# Altium PCB ver_6.PcbDoc
Units mil, origin at the board's own origin, x right, y up, seen from the top; angles counter-clockwise.
Board outline 2874.65 x 4650.67 mil, 2 copper layers (Top Layer, Bottom Layer); 64 components, 49 nets, 262 pads, 38 vias.
Unrouted connection lines stored in the file: 5.
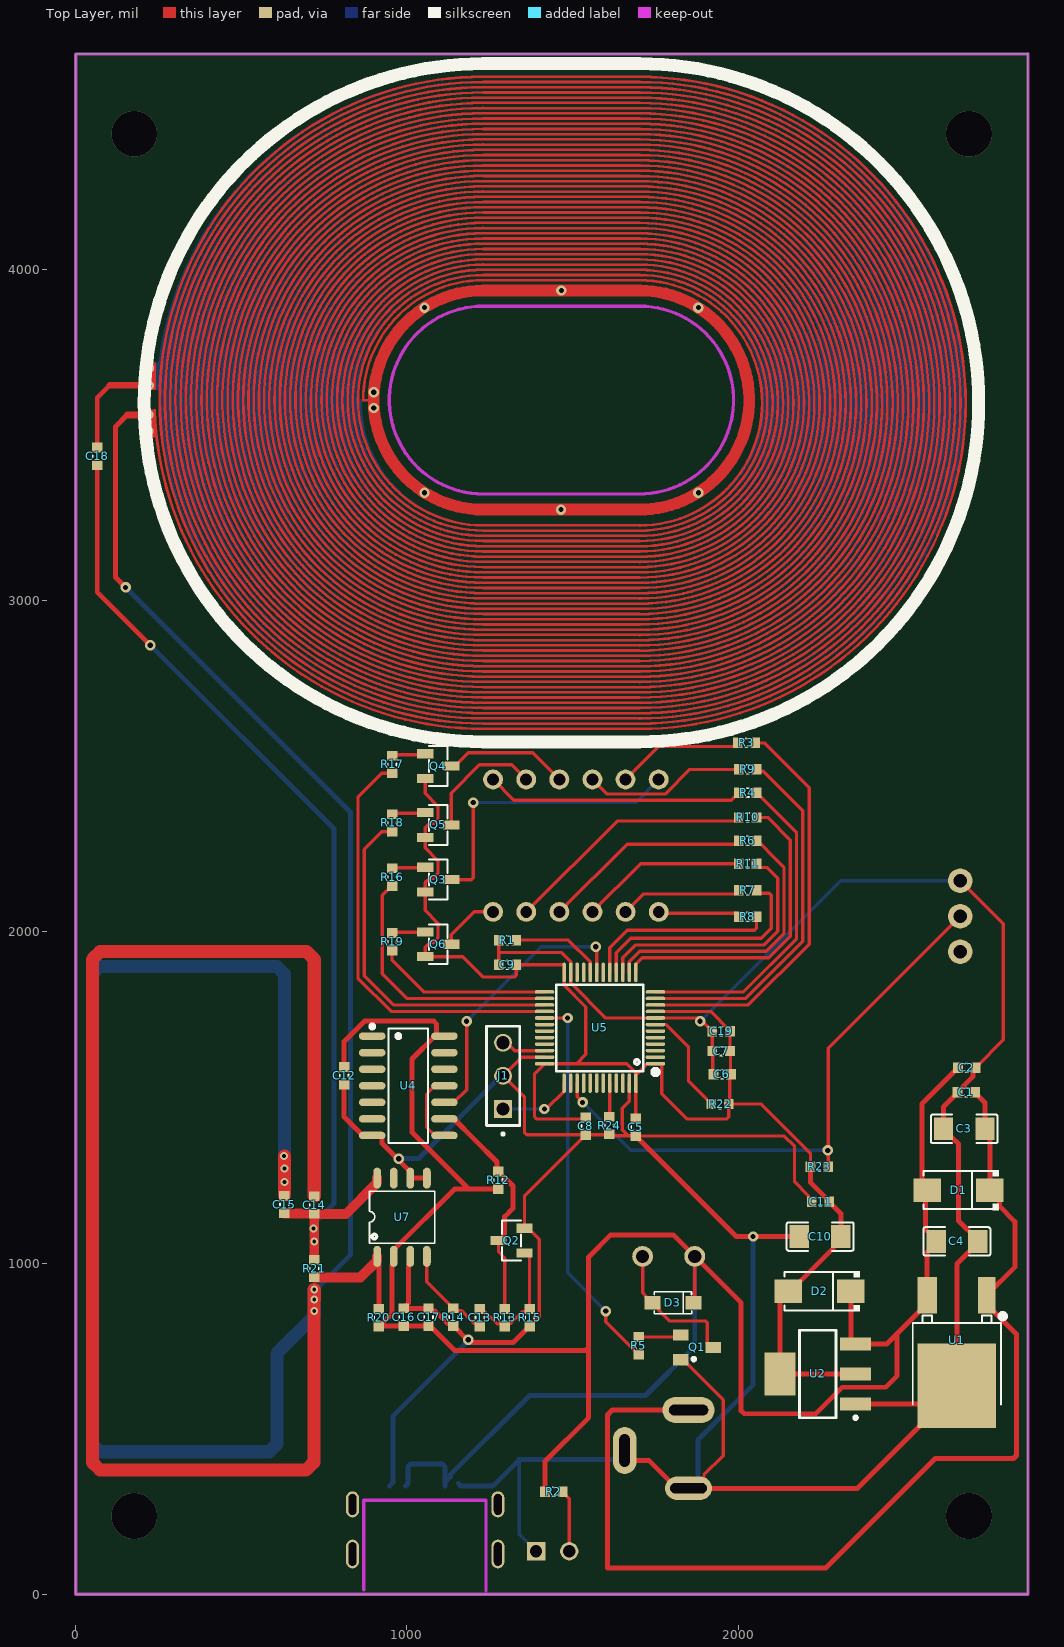
[diagram p0: Top Layer view]
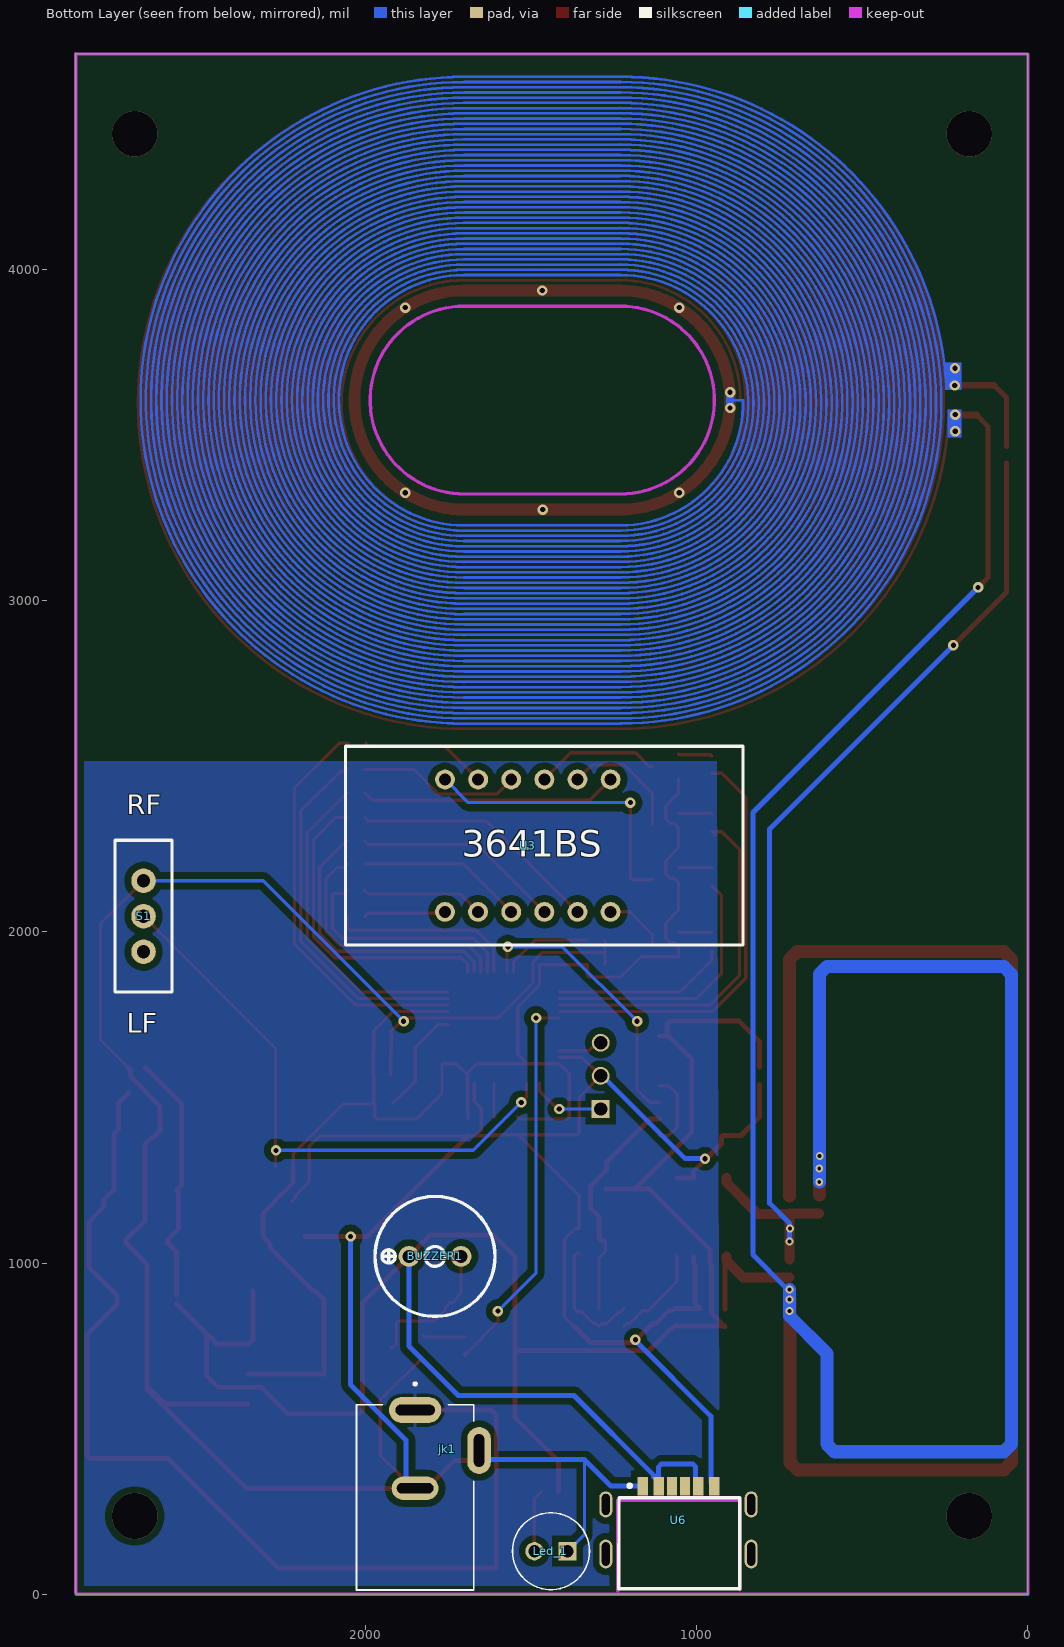
[diagram p1: Bottom Layer view, seen from below]
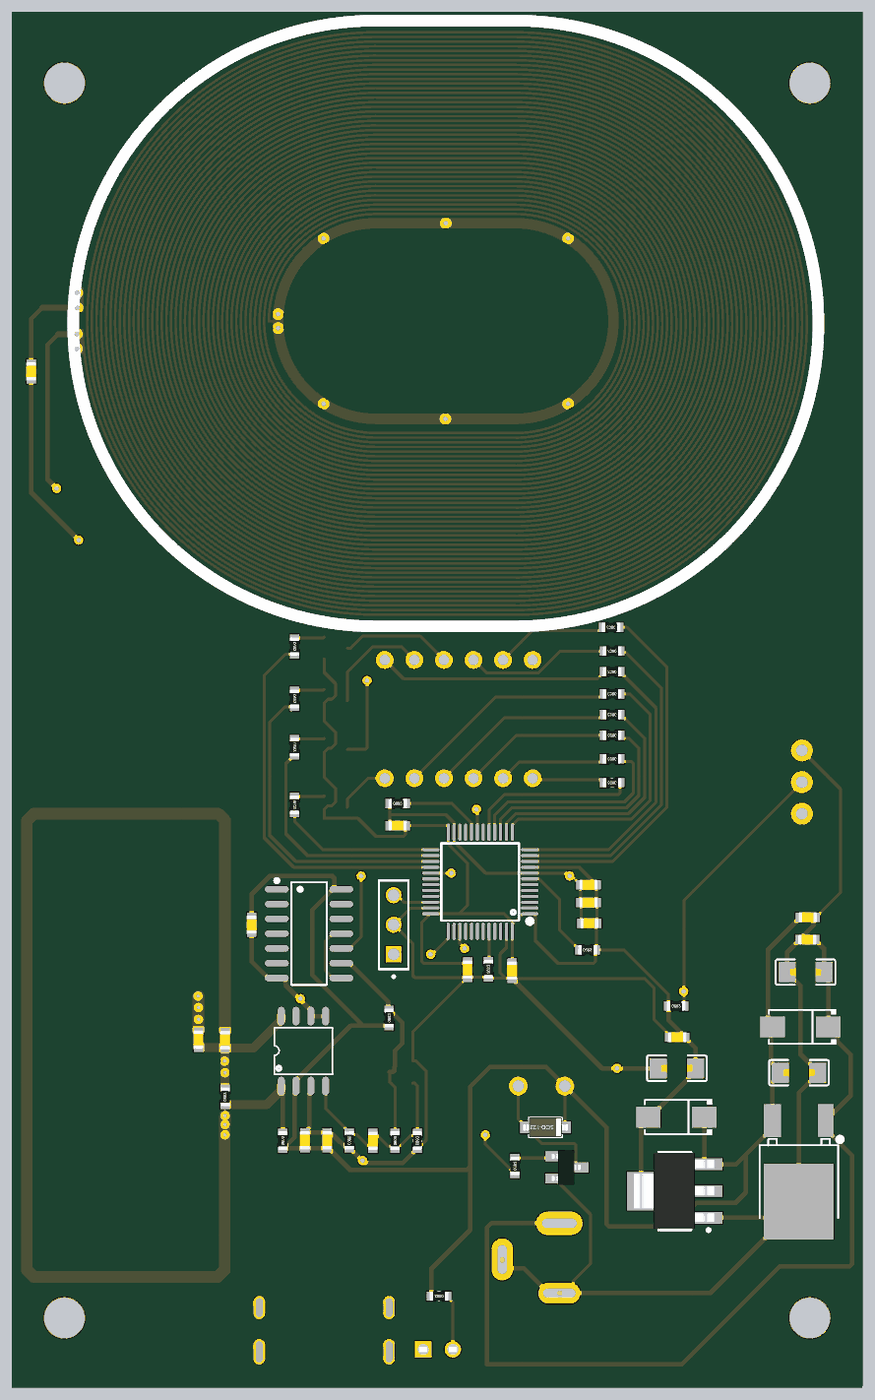
[diagram p2: 3D render of the assembled board from above, using the file's embedded part models]

## Layer stack, top to bottom
Top Solder: solder mask 0.4, Solder Resist, Dk 3.5
Top Layer: signal copper 1.4
Dielectric 1: dielectric 12.6, FR-4, Dk 4.8
Bottom Layer: signal copper 1.4
Bottom Solder: solder mask 0.4, Solder Resist, Dk 3.5

## Board outline
0,0 2874.02,0 2874.65,5 2874.65,4650.67 2874.02,4649.96 0,4650

## Design rules (kind name [scope] priority, off if disabled: settings)
Clearance [All] p1: gap=20 ignorepadtopadclearanceinfootprint=FALSE
PolygonConnect [All] p1: connectstyle=Relief reliefconductorwidth=10 reliefentries=4 polygonreliefangle="90 Angle" airgapwidth=10
RoutingVias [All] p1: holewidth=15.75 width=31.5 viastyle="Through Hole" minholewidth=11.81 minwidth=23.62 maxholewidth=15.75 maxwidth=31.5
SolderMaskExpansion [All] p1: expansion=4 istentingtop=FALSE
Width [InNet('3V3') or ('5V') or InNet('9V') or InNet('GND')] p1: maxlimit=15 minlimit=10 preferedwidth=15
Width Width_1 [All] p2: maxlimit=30 minlimit=10 preferedwidth=15
30 further rules are at their usual default settings.

## Classes and differential pairs
component class ver_3: C3 C5 C6 C7 C8 C9 D2 J1 Led_1 Q Q1 Q2 Q3 Q4 Q5 Q6 R1 R2 R5 R12 R13 R14 R15 R16 R17 R18 R19 R20 R21 R22 U1 U2 U4 U7

## Components (designator, comment, footprint, x,y, rotation, side; value= is the part's Value field where it differs from the comment)
BUZZER1 "buzzer_9x5.5" buzzer_9x5.5 1790,1020 r90 bottom
C1 "0.1uF" CN-SMD-0603 2688.43,1515 r0 top
C2 "0.1uF" CN-SMD-0603 2690,1590 r180 top
C3 "22uF" cap_1206 2682.3,1405 r0 top
C4 "22uF" cap_1206 2660,1065 r180 top
C5 "104" CN-SMD-0603 1690,1410 r270 top
C6 "104" CN-SMD-0603 1951.57,1570 r180 top
C7 "104" CN-SMD-0603 1948.43,1640 r0 top
C8 "104" CN-SMD-0603 1540,1413.43 r270 top
C9 "104" CN-SMD-0603 1303.43,1900 r0 top
C10 "22uF" cap_1206 2247.3,1080 r0 top
C11 "0.1uF" CN-SMD-0603 2248.43,1185 r0 top
C12 "104" CN-SMD-0603 810,1565 r90 top
C13 "150pF" CN-SMD-0603 1220,835 r270 top
C14 "100pF" CN-SMD-0603 720,1175 r90 top
C15 "1nF" CN-SMD-0603 630,1176.58 r90 top
C16 "104" CN-SMD-0603 990,836.57 r270 top
C17 "104" CN-SMD-0603 1065,836.57 r270 top
C18 "1nF" CN-SMD-0603 65,3435 r90 top
C19 "104" CN-SMD-0603 1948.43,1700 r180 top
D1 "diode_1N4007(M7)" diode_1N4007-M7 2665,1220 r180 top
D2 "diode_1N4007(M7)" diode_1N4007-M7 2245.51,915 r180 top
D3 "1N4148" SOD-123 1805.35,878.43 r0 top value=1N4007
J1 "JP3x1" JP3x1 1290,1390 r90 top
jk1 "jack dc" "jack dc" 1850,556.22 r270 bottom
Led_1 "led_5mm" led_5mm 1440,130 r0 bottom
Q1 "AO3400" SOT23B 1876.18,745.24 r270 top value=C1815
Q2 "J3Y" j3y -15636.99,17664.6 r0 top
Q3 "2TY" 2TY 18046.99,-14439.6 r180 top
Q4 "2TY" 2TY 18046.99,-14097 r180 top
Q5 "2TY" 2TY 18046.99,-14274.6 r180 top
Q6 "2TY" 2TY 18046.99,-14634.6 r180 top
R1 "10K" RES-SMD-0603 1303.43,1975 r0 top value="R1/4W - 1K"
R2 "1K" RES-SMD-0603 1443.43,310 r180 top value="R1/4W - 1K"
R3 "330" RES-SMD-0603 2025,2570 r180 top value="R1/4W - 1K"
R4 "330" RES-SMD-0603 2028.42,2420 r180 top value="R1/4W - 1K"
R5 "1K" RES-SMD-0603 1700,750 r90 top value="R1/4W - 1K"
R6 "330" RES-SMD-0603 2028.42,2275 r180 top value="R1/4W - 1K"
R7 "330" RES-SMD-0603 2028.42,2125 r180 top value="R1/4W - 1K"
R8 "330" RES-SMD-0603 2028.42,2045 r180 top value="R1/4W - 1K"
R9 "330" RES-SMD-0603 2028.42,2490 r180 top value="R1/4W - 1K"
R10 "330" RES-SMD-0603 2028.42,2345 r180 top value="R1/4W - 1K"
R11 "330" RES-SMD-0603 2028.42,2205 r180 top value="R1/4W - 1K"
R12 "2.2K" RES-SMD-0603 1275,1250 r90 top value="R1/4W - 1K"
R13 "6.8K" RES-SMD-0603 1295,835 r90 top value="R1/4W - 1K"
R14 "1K" RES-SMD-0603 1140,836.57 r270 top value="R1/4W - 1K"
R15 "2.2K" RES-SMD-0603 1370,835 r270 top value="R1/4W - 1K"
R16 "330" RES-SMD-0603 955,2165 r270 top value="R1/4W - 1K"
R17 "330" RES-SMD-0603 955,2505 r270 top value="R1/4W - 1K"
R18 "330" RES-SMD-0603 955,2328.43 r270 top value="R1/4W - 1K"
R19 "330" RES-SMD-0603 955,1970 r270 top value="R1/4W - 1K"
R20 "47K" RES-SMD-0603 915,835 r90 top value="R1/4W - 1K"
R21 "1K5" RES-SMD-0603 720,983.43 r90 top value="R1/4W - 1K"
R22 "4.7K" RES-SMD-0603 1945,1480 r0 top value="R1/4W - 1K"
R23 "1K" RES-SMD-0603 2245,1290 r0 top value="R1/4W - 1K"
R24 "47K" RES-SMD-0603 1610,1415 r90 top value="R1/4W - 1K"
S1 "nut_gat_3P" nut_gat_3p 2670,2047 r0 bottom
U1 "78M05" 78M05 2665,730 r270 top
U2 "AMS1117" AMS1117-SOT223 2240,665 r180 top
U3 "3641AS" 3641BS 1460,2260 r180 bottom
U4 "SN74HC14DRG4" 74HC14 1004.02,1539.37 r270 top
U5 "STM32F103C8T6" LQFP-48_L7.0-W7.0-P0.50-LS9.0-BL 1582.68,1710.16 r90 top
U6 "USB-TYPE-C-6-PIN-CONG" USB-TYPE-C-6-PIN-CONG 1055,180 r180 bottom
U7 "MC12079" MC12079 985,1138.11 r0 top

## Footprints (in the part's own frame and the unit in brackets; to place one, negate y for a bottom-side part, rotate by r counter-clockwise, add the part's x,y. Pads: shape width x height; smd on the part's side, far side on the other; paste and mask are expansions set on the pad)
2TY [mm]
  rect 1.25x0.7 smd paste+0 mask+0.051: 1(431.596,-422.514) 2(431.596,-420.614) 3(429.597,-421.564)
  silkscreen extent 429.87,-423.09 431.32,-420.04
74HC14 [mil]
  oval 22.6x80.24 smd paste+0 mask+2: 1(-145.63,-109.02) 2(-95.63,-109.02) 3(-45.63,-109.02) 4(4.37,-109.02) 5(54.37,-109.02) 6(104.37,-109.02) 7(154.37,-109.02) 8(154.37,109.02) 9(104.37,109.02) 10(54.37,109.02) 11(4.37,109.02) 12(-45.63,109.02) 13(-95.63,109.02) 14(-145.63,109.02)
  silkscreen extent -181,-115 178,60
78M05 [mm]
  rect 2.8x1.35 smd paste+0 mask+0.051: 1(-4.4,2.174)
  rect 2.8x1.5 smd paste+0 mask+0.051: 3(-4.4,-2.406)
  rect 6.5x6 smd paste+0 mask+0.051: 4(2.55,-0.134)
  silkscreen extent -2.98,-3.51 3.98,3.59
3641BS [mil]
  round 60 hole 36 paste+0 mask+2: 1(-300,-200) 2(-200,-200) 3(-100,-200) 4(0,-200) 5(100,-200) 6(200,-200) 7(200.1,199.9) 8(100.1,199.9) 9(0.1,199.9) 10(-99.9,199.9) 11(-199.8,199.8) 12(-299.8,199.8)
  silkscreen extent -600,-300 600,300
AMS1117-SOT223 [mm]
  rect 2.4x1 smd: 1(-2.9,2.3) 2(-2.9,0) 3(-2.9,-2.3)
  rect 2.4x3.3 smd: 2(2.9,0)
  silkscreen extent -3.03,-3.35 1.4,3.47, body extent -3.39,-3.27 3.5,3.23, height 1.72
buzzer_9x5.5 [mm]
  round 1.6 hole 1 paste+0 mask+0.051: 1(0,1.999) 2(0,-1.999)
  silkscreen extent -4.6,-4.6 4.6,4.6
cap_1206 [mm]
  rect 1.485x1.728 smd paste-100 mask+0.051: 1(-1.593,0) 2(1.593,0)
  silkscreen extent -2.56,-1.09 2.56,1.09
CN-SMD-0603 [mm]
  round 0.254 on Mech15: 0(0,0)
  rect 0.75x0.8 smd: 1(-0.675,0) 2(0.675,0)
  silkscreen extent -0.1,-0.34 0.1,0.34, body extent -0.8,-0.43 0.8,0.43, height 0.8
diode_1N4007-M7 [mm]
  rect 2.1x1.8 smd paste+0 mask+0.051: 1(-2.4,0) 2(2.4,0)
  silkscreen extent -3.08,-1.54 2.7,1.54
j3y [mm]
  rect 1.25x0.7 smd paste+0 mask+0.051: 1(431.596,-422.514) 2(431.596,-420.614) 3(429.597,-421.564)
  silkscreen extent 429.87,-423.09 431.32,-420.04
"jack dc" [mm]
  oval 2x4 hole 0.8 slot 3 at 90 deg: 1(0,0)
  oval 1.8x3.6 hole 0.8 slot 2.8 at 90 deg: 2(6,0)
  oval 3.6x1.8 hole 0.8 slot 2.5 at 0 deg: 3(3.1,4.9)
  silkscreen extent -2.1,-4.5 13.8,4.5
JP3x1 [mm]
  rect 1.37x1.37 hole 1.02: 01(1.905,0)
  round 1.37 hole 1.02: 02(4.445,0) 03(6.985,0)
  silkscreen extent -0.11,-1.27 8.25,1.27
led_5mm [mm]
  round 1.4 hole 0.93: A(1.27,0)
  rect 1.4x1.4 / inner round 1.4 / far side rect 1.4x1.4 hole 0.93: C(-1.27,0)
  silkscreen extent -2.95,-2.95 2.95,2.95, body extent -2.5,-2.95 2.95,2.95, height 9.6
LQFP-48_L7.0-W7.0-P0.50-LS9.0-BL [mm]
  oval 0.27x1.5 smd paste+0 mask+0.05: 1(-2.75,-4.25) 2(-2.25,-4.25) 3(-1.75,-4.25) 4(-1.25,-4.25) 5(-0.75,-4.25) 6(-0.25,-4.25) 7(0.25,-4.25) 8(0.75,-4.25) 9(1.25,-4.25) 10(1.75,-4.25) 11(2.25,-4.25) 12(2.75,-4.25) 25(2.75,4.25) 26(2.25,4.25) 27(1.75,4.25) 28(1.25,4.25) 29(0.75,4.25) 30(0.25,4.25) 31(-0.25,4.25) 32(-0.75,4.25) 33(-1.25,4.25) 34(-1.75,4.25) 35(-2.25,4.25) 36(-2.75,4.25)
  oval 1.5x0.27 smd paste+0 mask+0.05: 13(4.25,-2.75) 14(4.25,-2.25) 15(4.25,-1.75) 16(4.25,-1.25) 17(4.25,-0.75) 18(4.25,-0.25) 19(4.25,0.25) 20(4.25,0.75) 21(4.25,1.25) 22(4.25,1.75) 23(4.25,2.25) 24(4.25,2.75) 37(-4.25,2.75) 38(-4.25,2.25) 39(-4.25,1.75) 40(-4.25,1.25) 41(-4.25,0.75) 42(-4.25,0.25) 43(-4.25,-0.25) 44(-4.25,-0.75) 45(-4.25,-1.25) 46(-4.25,-1.75) 47(-4.25,-2.25) 48(-4.25,-2.75)
  silkscreen extent -3.59,-4.46 3.3,3.34, body extent -4.5,-4.5 4.5,4.5, height 1.5
MC12079 [mm]
  oval 0.6x1.6 smd paste+0 mask+0.051: 1(-1.905,-3) 2(-0.635,-3) 3(0.635,-3) 4(1.905,-3) 5(1.905,3) 6(0.635,3) 7(-0.635,3) 8(-1.905,3)
  silkscreen extent -2.5,-2 2.5,2
nut_gat_3p [mil]
  round 74 hole 40 paste+0 mask+2: 1(0,107) 2(0,0) 3(0,-107)
  silkscreen extent -86,-229 86,229
RES-SMD-0603 [mm]
  round 0.254 on Mech15: 0(0,0)
  rect 0.75x0.8 smd: 1(-0.675,0) 2(0.675,0)
  silkscreen extent -0.1,-0.34 0.1,0.34, body extent -0.8,-0.4 0.8,0.4, height 0.43
SOD-123 [mm]
  rect 1.2x1 smd: 1(-1.635,0.04) 2(1.515,0.04)
  silkscreen extent -1.48,-0.81 1.37,0.89, body extent -1.98,-0.81 1.87,0.89, height 1.43
SOT23B [mm]
  rect 0.85x1.2 smd: 1(0.946,-1.255) 2(0.006,1.24) 3(-0.944,-1.26)
  silkscreen extent 0.77,-0.39 1.02,-0.14, body extent -1.49,-1.31 1.51,1.19, height 1.06
USB-TYPE-C-6-PIN-CONG [mm]
  oval 1x2.2 hole 0.6 slot 1.8 at 90 deg paste+0 mask+0.051: 7(-5.575,-1.482) 8(5.575,-1.482)
  oval 1x2 hole 0.6 slot 1.6 at 90 deg paste+0 mask+0.051: 7(-5.575,2.318) 8(5.575,2.318)
  rect 0.8x1.4 smd paste-100 mask+0.051: A5(-0.5,3.718) A9(1.52,3.718) A12(2.75,3.718) B5(0.5,3.718) B9(-1.52,3.718) B12(-2.75,3.718)
  Keep-Out Layer lines w0.254: 4.715,-4.251 4.715,2.649 -4.455,2.649 -4.66,2.649 -4.66,-4.291
  silkscreen extent -4.58,-4.14 4.69,3.88

## Part data
C1 C2 C11: library part "CAP 104"
C3 C4 C10: library part cap_1206
C5 C6 C7 C8 C9 C12 C13 C14 C15 C16 C17 C18 C19: library part "Tu 0805_1", "Tu 0805", Bottom=10, Right=20
D3: library part D1A, "Diode 1A"
Q1: library part C1815, "NPN 600mW, ECB"
Q2: library part S8050/J3Y/0.4
R1 R12 R13 R14 R15 R20 R21 R22 R23 R24: library part "Tro 0805_1", "Tro 0805"
R2 R3 R4 R5 R6 R7 R8 R9 R10 R11 R16 R17 R18 R19: library part Res, "Resistor 1/4W"
U5: library part APM32F030C8T6

## Via types
v1: diameter 31.5, hole 15.75, Top Layer to Bottom Layer, 26 vias
v2: diameter 23.62, hole 11.81, Top Layer to Bottom Layer, 8 vias
v3: diameter 137.8, hole 137.8, Top Layer to Bottom Layer, 4 vias

## Nets (pads, with @x,y where several pads share a name; then routed paths per layer and width w, separated by ;. In a path a pad name is that pad's centre, name@x,y a point inside that pad or via, vN(x,y) a via of type N, cw(c..) or ccw(c..) an arc to the next point about the centre after c; other vN are vias at no path point)
3V3: C5.1 C6.1 C7.2 C8.1 C9.2 C10.2 C11.2 C19.1 D2.2 Q3.2 Q4.2 Q5.2 Q6.2 R22.2 R23.1 U2.2 U5.1 U5.9 U5.24 U5.36 U5.48 | length 4503.5
  Top Layer w10: Q4.2 1055,2417.99 1093.61,2379.38 1093.61,2340.23 1080.38,2327 1068.22,2327 1055,2313.78 Q5.2 1055,2252.99 1093.61,2214.38 1093.61,2175.23 1080.38,2162 1068.22,2162 1055,2148.78 Q3.2 1055,2065.03 1093.61,2026.42 1093.61,1980.23 1080.38,1967 1068.22,1967 1055,1953.78 Q6.2 1168.57,1925 1230.18,1863.39 1324.14,1863.39 1330,1869.25 C9.2 1474.12,1900 U5.24@1474.42,1899.71 ; U5.24 U5.24@1474.42,1899.71 ; C8.1 1535,1435 1390.86,1435 1385,1440.86 1385,1571.53 U5.36 1470,1601.89 1474.42,1601.89 1511.89,1601.89 ; C5.1 1690.95,1437.53 U5.48 1690.95,1554.95 1690.95,1567.06 1725.79,1601.89 U5.1 1768.92,1601.89 1769.21,1601.6 1769.21,1510.79 1845,1435 1965.72,1435 1971.57,1440.86 R22.2 R22.2@1972.56,1480 ; U5.48@1690.83,1567.06 1690.83,1574.8 1663.74,1601.89 1511.89,1601.89 ; U5.9 1916.61,1759.37 1975,1700.98 C19.1 C7.2 1976.57,1638.43 1976.57,1571.57 C6.1 1974.86,1566.71 1974.86,1482.3 R22.2@1972.56,1480 ; R23.1 2218.43,1330.59 2069.02,1480 R22.2@1972.56,1480 ; U5.24@1474.42,1899.71 1474.42,1853.1 1474.79,1852.72 1474.79,1838.08 1540,1772.87 1540,1630 1511.89,1601.89
  Top Layer w15: R23.1 2218.43,1242.56 2275,1185.98 C11.2 2275,1184.02 2310,1149.02 C10.2 2288.27,1058.27 2288.27,1046.34 2156.92,915 D2.2 2125.83,889.81 2125.83,665 U2.2@2354.17,665
4A: Q2.3 R12.2 R13.2 U4.9 | length 708.8
  Top Layer w10: Q2.3 1276.26,1033.74 1295,1015 R13.2
  Top Layer w15: U4.9 1141.85,1435 1205.03,1371.82 1271.8,1305.05 1271.8,1279.77 R12.2 1275.98,1276.57 1320,1232.56 1320,1165 1295,1140 1295,1088.61 1293.37,1086.98 1293.37,1073.88 1287.09,1067.6 Q2.3
4Y: U4.8 U4.11 | length 228.6
  Top Layer w10: U4.8 1084.21,1385 1058.91,1410.3 1058.91,1509.7 1084.21,1535 U4.11
5V: BUZZER1.1 C2.2 C4.2 C12.2 C16.2 C17.2 D1.2 D2.1 D3.2 R2.2 R12.1 R20.1 U1.3 U2.3 U4.14 U6.A9 U6.B9 U7.2 | length 7410.3
  Top Layer w10: D3.2 1868.7,883.7 BUZZER1.1
  Top Layer w15: C12.2 810,1668.13 871.87,1730 1080.94,1730 1089.72,1721.21 1089.72,1688.51 U4.14@1093.23,1685 ; R20.1 915.98,808.43 R20.1@916.77,809.21 ; U4.14 U4.14@1093.23,1685 ; R12.1 1186.58,1223.42 ; R2.2 1416.85,401.85 1548.31,533.31 1548.31,745.81 ; D2.1 2340,767.74 2352.19,755.55 U2.3 2448.18,755.55 2480,787.37 ; U1.3@2570.27,877.64 2480,787.37 ; U1.3 2570.27,1033.18 2597.3,1060.22 C4.2 2597.3,1069.78 2565,1102.09 2565,1214.49 D1.2 2555,1235.51 2555,1480.59 2663.43,1589.02 C2.2 ; R20.1@916.77,809.21 955,847.44 955,992.98 960,997.98 U7.2 960,1039.68 1143.74,1223.42 1186.58,1223.42 ; R20.1@916.77,809.21 989.21,809.21 C16.2 C17.2 1072.26,802.74 1077.26,802.74 1144,736 1538.5,736 1548.31,745.81 ; U4.14@1093.23,1685 1084.21,1685 1015,1615.79 1015,1395 1186.58,1223.42 ; 1548.31,745.81 1548.31,1018.31 1615,1085 1803.7,1085 BUZZER1.1 2008.94,879.76 2008.94,553.79 2017.73,545 2234.46,545 2314.46,625 2445,625 2480,660 2480,787.37
  Bottom Layer w15: U6.A9 1003.07,334.31 1003.07,384.48 1011.85,393.27 1106.06,393.27 1114.84,384.48 U6.B9@1114.84,338.21 ; U6.B9 U6.B9@1114.84,338.21 ; BUZZER1.1 1868.7,748.7 1720,600 1370.23,600 1131.02,360.79 1131.02,354.38 U6.B9@1114.84,338.21
9V: C1.2 C3.2 D1.1 jk1.1 U1.1 | length 3306.6
  Top Layer w15: jk1.1 1620.01,556.22 1605.15,541.37 1605.15,79.85 2264.85,79.85 2595,410 2831.21,410 2840,418.79 2840,785.27 2750.59,874.69 U1.1 2835,987.64 2835,1125 2789.04,1170.96 2789.04,1192.07 2761.11,1220 D1.1 2759.49,1390.51 C3.2 2745,1484.02 2715,1514.02 C1.2
A: R3.2 U3.11 | length 384.8
  Top Layer w10: U3.11 1759.25,2559.25 1988.66,2559.25 1998.43,2569.02 R3.2
B: R4.2 U3.7 | length 778.3
  Top Layer w10: U3.7 1323,2396.8 1979.63,2396.8 2001.85,2419.02 R4.2
BOOT0: R24.2 U5.44 | length 102.2
  Top Layer w10: R24.2 1612.21,1443.79 U5.44
buzzer: R5.1 U5.29 | length 1175.7
  Top Layer w10: U5.29 1415.25,1739.58 v1(1485,1739.58) ; v1(1600,855) 1600,822.44 R5.1@1699.02,723.43
  Top Layer w15: R5.1@1699.02,723.43 R5.1
  Bottom Layer w10: v1(1485,1739.58) 1485,970 v1(1600,855)
C: R6.2 U3.4 | length 631.5
  Top Layer w10: U3.4 1664.25,2264.25 1992.09,2264.25 2001.85,2274.02 R6.2
D: R7.2 U3.2 | length 369.4
  Top Layer w10: U3.2 1714.25,2114.25 1992.09,2114.25 2001.85,2124.02 R7.2
DIG1: Q3.3 U3.12 | length 884.1
  Top Layer w10: Q3.3 1194.14,2157.4 1200,2163.26 v1(1200,2390)
  Bottom Layer w10: v1(1200,2390) 1690,2390 U3.12
DIG2: Q4.3 U3.9 | length 375.9
  Top Layer w10: Q4.3 1144.56,2500 1184.56,2540 1379.8,2540 U3.9
DIG3: Q5.3 U3.8 | length 376
  Top Layer w10: Q5.3 1133.74,2418.74 1218.9,2503.9 1315.9,2503.9 U3.8
DIG4: Q6.3 U3.6 | length 183.5
  Top Layer w10: Q6.3 1133.74,1991.18 1202.55,2060 U3.6
DP: R11.2 U3.3 | length 501.9
  Top Layer w10: U3.3 1705,2205 R11.2
E: R8.2 U3.1 | length 248.6
  Top Layer w10: U3.1 1764.25,2055.75 1992.09,2055.75 2001.85,2045.98 R8.2
F: R9.2 U3.10 | length 491
  Top Layer w10: U3.10 1604,2415.8 1779.73,2415.8 1853.93,2490 R9.2
G: R10.2 U3.5 | length 760.5
  Top Layer w10: U3.5 1634.25,2334.25 1992.09,2334.25 2001.85,2344.02 R10.2
GND: C1.1 C2.1 C3.1 C4.1 C5.2 C6.2 C7.1 C8.2 C9.1 C10.1 C11.1 C12.1 C16.1 C17.1 C19.2 J1.02 jk1.2 jk1.3 Led_1.C Q1.1 Q2.2 R1.1 R14.2 R15.2 R24.1 S1.3 U1.4 U2.1 U4.7 U5.8 U5.23 U5.35 U5.47 U6.A12 U6.B12 U7.3 U7.5 U7.6 | length 12204.8
  Top Layer w10: C9.1 1276.85,1937.5 ; R1.1 1276.85,1937.5 ; R15.2 1370.98,808.42 1399.75,837.19 1399.75,1071.08 1365.83,1105 Q2.2 1355,1202.84 C8.2@1539.02,1386.85 ; U5.35 1346.59,1621.59 J1.02 1355,1500 1355,1392.71 1360.86,1386.85 C8.2 1540.79,1387.64 1602.36,1387.64 1605.79,1384.21 R24.1 1614.21,1384.21 1668.23,1384.21 ; U5.47 1671.26,1488.15 1650,1466.89 1650,1402.44 1668.23,1384.21 ; C5.2 1689.21,1384.21 1668.23,1384.21 ; C5.2@1690.98,1383.43 2138.72,1383.43 2170,1352.15 2170,1245 2212.09,1202.91 2212.09,1194.76 C11.1 ; Q1.1 1833.68,708 1955,586.68 1955,418.54 1896.61,360.15 1896.61,348.12 1868.49,320 jk1.2 ; v1@1882.15,1739.7 U5.8 1749.88,1739.58 1600.16,1739.58 1494.23,1845.51 1494.23,1877.37 U5.23 1493.99,1877.61 1493.99,1909.44 1465.93,1937.5 1276.85,1937.5 ; v1@1888.61,1733.24 1911.1,1710.75 1912.09,1710.75 1921.85,1700.98 C19.2 C7.1 1923.43,1638.43 1923.43,1571.57 C6.2 ; S1.3 2800,2024 2800,1673.42 C2.1
  Top Layer w15: C12.1 810,1441.18 866.18,1385 U4.7 921.76,1385 925.27,1381.49 925.27,1360.63 1010,1275.91 U7.6 U7.5 ; C16.1 C17.1@1065.98,863.15 ; C16.1@998.25,870.41 998.25,872.45 1005,879.2 1005,992.98 1010,997.98 U7.3 ; C17.1 C17.1@1065.98,863.15 ; v1@1183.87,767.12 1140.98,810 R14.2 1132.74,817.26 1123.43,817.26 1110.7,830 1110,830 1084.11,855.89 1073.25,855.89 C17.1@1065.98,863.15 ; v1@1190.98,760 1320.59,760 1369.02,808.42 R15.2 ; jk1.3 1657.09,430.24 1682.89,404.43 1730.14,404.43 1814.57,320 jk1.2 ; C5.2 1690.98,1383.43 1994.41,1080 C10.1 ; jk1.2@1868.49,320 2359.98,320 2659.74,619.76 U1.4 ; U2.1 2354.72,575 2605.14,575 U1.4 ; C2.1 2709.31,1582.74 2709.31,1563.45 2661.85,1515.98 C1.1 2661.85,1514.02 2619.61,1471.77 C3.1 2619.61,1400.22 2641.34,1378.48 2646.12,1378.48 2665,1359.61 2665,1127.48 2722.7,1069.78 C4.1 2722.7,1060.22 2659.74,997.26 U1.4
  Bottom Layer w10: 1338.59,406.24 1338.59,181.41 Led_1.C ; v1(1885,1729.62) 1885,1730 2309,2154 S1.3
  Bottom Layer w15: U6.A12 957.48,337.14 957.48,537.48 1185,765 v1(1185,768.25) ; v1(975,1315) 1035,1315 1285,1565 J1.02 ; U6.B12@1155.02,334.64 U6.B12 1258.75,326.4 1338.59,406.24 1631.28,406.24 1657.09,432.05 jk1.3 ; jk1.2 1852.13,320 1877.93,345.81 1877.93,465.77 2045,632.84 v1(2045,1080)
NetBUZZER1_2: BUZZER1.2 D3.1 Q1.2 | length 435.7
  Top Layer w10: BUZZER1.2 1711.3,909.68 1722.36,898.62 1722.36,894.69 1737.05,880 1744.92,880 1759.61,865.31 1759.61,857.44 1792.05,825 1900.52,825 1906.38,819.14 1906.38,756.73 1918.11,745 Q1.2
NetC13_1: C13.1 Q2.1 R13.1 R15.1 | length 372.5
  Top Layer w10: C13.1 1229.76,851.81 1236.89,851.81 1271.77,816.92 1286.5,816.92 R13.1 1304.76,818.19 1313.19,818.19 1347.42,852.42 1360.85,852.42 R15.1 1370,1021.42 1361.22,1030.2 Q2.1
NetC14_1: C14.1 C15.1 C18.1 R21.2 U7.8 | length 471.7
  Top Layer w30: C15.1 717.91,1150 C14.1@719.49,1148.42 ; R21.2 720,1147.91 C14.1@719.49,1148.42 ; U7.8 910,1242.91 815.51,1148.42 C14.1 C14.1@719.49,1148.42
NetC14_2: C14.2 C15.2 C18.2 R20.2 R21.1 U7.1 | length 3042.2
  Top Layer w15: 65,3415 65,3025 v1(225,2865) ; U7.1@910,1006.69 910,997.98 915,992.98 R20.2
  Top Layer w30: R21.1 860.16,956.85 910,1006.69 U7.1
  Bottom Layer w15: v1(225,2865) 780,2310 780,1180 720,1120 720,1065
Netled_1_A: Led_1.A R2.1 | length 188.3
  Top Layer w10: R2.1 1470,309.02 1490,289.02 Led_1.A
NetQ1_3: Q1.3 R5.2 | length 129
  Top Layer w10: R5.2 1820.75,776.57 Q1.3
NetQ3_1: Q3.1 R16.1 | length 101.3
  Top Layer w10: R16.1 956.61,2193.19 1053.39,2193.19 Q3.1
NetQ4_1: Q4.1 R17.1 | length 102.4
  Top Layer w10: R17.1 957.91,2534.49 1052.09,2534.49 Q4.1
NetQ5_1: Q5.1 R18.1 | length 102
  Top Layer w10: R18.1 957.4,2357.4 1052.6,2357.4 Q5.1
NetQ6_1: Q6.1 R19.1 | length 101.3
  Top Layer w10: R19.1 956.61,1998.19 1053.39,1998.19 Q6.1
NRST: R22.1 U5.7 | length 329
  Top Layer w10: U5.7 1750.12,1719.88 1781.97,1719.88 1850,1651.85 1850,1548.43 1907.68,1490.75 1908.66,1490.75 1918.43,1480.98 R22.1
OUT: C13.2 R14.1 U7.4 | length 293.8
  Top Layer w10: U7.4 1060,943.15 1129.25,873.9 1129.25,872.91 1145.96,856.2 1164.78,856.2 1180,840.98 1180,840 1201.81,818.19 1210.24,818.19 C13.2
PA0: R3.1 U5.10 | length 1230.2
  Top Layer w10: U5.10 2030.29,1779.07 2214,1962.78 2214,2434.15 2078.15,2570 R3.1
PA1: R9.1 U5.11 | length 1102.3
  Top Layer w10: U5.11 2023.09,1798.74 2195,1970.65 2195,2365 2075,2485 2060,2485 R9.1
PA2: R4.1 U5.12 | length 984.5
  Top Layer w10: U5.12 2015.92,1818.44 2176,1978.52 2176,2299 2065.75,2409.25 2064.76,2409.25 2055,2419.02 R4.1
PA3: R10.1 U5.13 | length 946.4
  Top Layer w10: U5.13 1690.96,1901.87 1691.27,1902.18 1691.27,1902.46 1710.81,1922 2092.61,1922 2157,1986.39 2157,2277.01 2089.01,2345 R10.1
PA4: R6.1 U5.14 | length 851.3
  Top Layer w10: U5.14 1671.39,1877.6 1671.39,1909.44 1702.94,1941 2084.74,1941 2138,1994.26 2138,2195.16 2107.72,2225.44 2068.91,2264.25 2064.76,2264.25 2055,2274.02 R6.1
PA5: R11.1 U5.15 | length 786.7
  Top Layer w10: U5.15 1651.71,1877.61 1651.71,1921.95 1689.76,1960 2076.87,1960 2119,2002.13 2119,2161 2085.75,2194.25 2064.76,2194.25 2055,2204.02 R11.1
PA6: R7.1 U5.16 | length 709.3
  Top Layer w10: U5.16 1632.02,1877.6 U5.16@1632.02,1902.26 ; U5.16@1631.9,1902.26 1631.9,1936.9 1675,1980 2070,1980 2100,2010 2100,2110.32 2094.14,2116.18 2063.82,2116.18 R7.1
PA7: R8.1 U5.17 | length 575.9
  Top Layer w10: U5.17 1612.34,1877.61 1612.34,1952.34 1665,2005 2049.14,2005 2055,2010.86 R8.1
PB0: R17.2 U5.28 | length 1284.6
  Top Layer w10: R17.2 924.25,2478.43 852,2406.17 852,1859.26 951.89,1759.37 U5.28
PB1: U4.10 U5.19 | length 851.3
  Top Layer w10: U4.10 1141.85,1485 1180,1523.15 v1(1180,1729.62) ; v1(1570,1955) 1572.73,1952.27 1572.73,1877.61 U5.19
  Bottom Layer w10: v1(1180,1729.62) 1405.38,1955 v1(1570,1955)
PB2: R1.2 U5.20 | length 282.2
  Top Layer w10: R1.2 1487.49,1975 1553.04,1909.45 1553.04,1877.6 U5.20
PC13: R19.2 U5.25 | length 529.6
  Top Layer w10: R19.2 955,1913.66 1050.23,1818.44 U5.25
PC14: R16.2 U5.26 | length 799.3
  Top Layer w10: R16.2 954.02,2138.43 925.25,2109.66 925.25,1872.88 999.39,1798.74 U5.26
PC15: R18.2 U5.27 | length 1099.3
  Top Layer w10: U5.27 959.06,1779.07 871,1867.13 871,2248.6 924.25,2301.85 R18.2 ; R18.2 954.02,2301.85 944.25,2292.09 944.25,2291.1 R18.2
SW: R23.2 S1.2 U5.39 | length 1786.7
  Top Layer w10: U5.39 1513.78,1501.22 v1(1530,1485) ; R23.2 2271.57,1648.57 S1.2
  Bottom Layer w10: v1(1530,1485) 1675,1340 v1(2270,1340)
SWCLK: J1.01 U5.37 | length 230.7
  Top Layer w10: v1(1415,1465) 1420.61,1465 1474.41,1518.8 U5.37
  Bottom Layer w10: J1.01 v1(1415,1465)
SWDIO: J1.03 U5.34 | length 135.2
  Top Layer w10: J1.03 1301.88,1665 1325.61,1641.26 U5.34
pads on no net: C1.0 C2.0 C5.0 C6.0 C7.0 C8.0 C9.0 C11.0 C12.0 C13.0 C14.0 C15.0 C16.0 C17.0 C18.0 C19.0 R1.0 R2.0 R3.0 R4.0 R5.0 R6.0 R7.0 R8.0 R9.0 R10.0 R11.0 R12.0 R13.0 R14.0 R15.0 R16.0 R17.0 R18.0 R19.0 R20.0 R21.0 R22.0 R23.0 R24.0 S1.1 U4.1 U4.2 U4.3 U4.4 U4.5 U4.6 U4.12 U4.13 U5.2 U5.3 U5.4 U5.5 U5.6 U5.18 U5.21 U5.22 U5.30 U5.31 U5.32 U5.33 U5.38 U5.40 U5.41 U5.42 U5.43 U5.45 U5.46 U6.7 U6.8 U6.A5 U6.B5 U7.7
copper on no net: | length 425141.9
  Top Layer w8: 238.42,3574.22 ccw(c1230.08,3604.79) 1230.08,2612.67 1702.15,2612.67 ; 899.37,3604.79 899.29,3604.79 867.87,3604.79 cw(c1230.08,3604.79) 1230.08,3967 ; 1230.08,3982.74 ccw(c1230.08,3604.79) 1230.08,3226.84 1702.15,3226.84 ; 1230.08,3998.49 ccw(c1230.08,3604.79) 1230.08,3211.09 1702.15,3211.09 ; 1230.08,4014.24 ccw(c1230.08,3604.79) 1230.08,3195.34 1702.15,3195.34 ; 1230.08,4029.99 ccw(c1230.08,3604.79) 1230.08,3179.59 1702.15,3179.6 ; 1230.08,4045.74 ccw(c1230.08,3604.79) 1230.08,3163.85 1702.15,3163.85 ; 1230.08,4061.48 ccw(c1230.08,3604.79) 1230.08,3148.1 1702.15,3148.1 ; 1230.08,4077.23 ccw(c1230.08,3604.79) 1230.08,3132.35 1702.15,3132.35 ; 1230.08,4092.98 ccw(c1230.08,3604.79) 1230.08,3116.6 1702.15,3116.6 ; 1230.08,4108.73 ccw(c1230.08,3604.79) 1230.08,3100.85 1702.15,3100.85 ; 1230.08,4124.48 ccw(c1230.08,3604.79) 1230.08,3085.11 1702.15,3085.11 ; 1230.08,4140.22 ccw(c1230.08,3604.79) 1230.08,3069.36 1702.15,3069.36 ; 1230.08,4155.97 ccw(c1230.08,3604.79) 1230.08,3053.61 1702.15,3053.61 ; 1230.08,4171.72 ccw(c1230.08,3604.79) 1230.08,3037.86 1702.15,3037.86 ; 1230.08,4187.47 ccw(c1230.08,3604.79) 1230.08,3022.11 1702.15,3022.11 ; 1230.08,4203.22 ccw(c1230.08,3604.79) 1230.08,3006.37 1702.15,3006.37 ; 1230.08,4218.96 ccw(c1230.08,3604.79) 1230.08,2990.62 1702.15,2990.62 ; 1230.08,4234.71 ccw(c1230.08,3604.79) 1230.08,2974.87 1702.15,2974.87 ; 1230.08,4250.46 ccw(c1230.08,3604.79) 1230.08,2959.12 1702.15,2959.12 ; 1230.08,4266.21 ccw(c1230.08,3604.79) 1230.08,2943.37 1702.15,2943.37 ; 1230.08,4281.96 ccw(c1230.08,3604.79) 1230.08,2927.63 1702.15,2927.63 ; 1230.08,4297.7 ccw(c1230.08,3604.79) 1230.08,2911.88 1702.15,2911.88 ; 1230.08,4313.45 ccw(c1230.08,3604.79) 1230.08,2896.13 1702.15,2896.13 ; 1230.08,4329.2 ccw(c1230.08,3604.79) 1230.08,2880.38 1702.15,2880.38 ; 1230.08,4344.95 ccw(c1230.08,3604.79) 1230.08,2864.63 1702.15,2864.63 ; 1230.08,4360.7 ccw(c1230.08,3604.79) 1230.08,2848.89 1702.15,2848.89 ; 1230.08,4376.45 ccw(c1230.08,3604.79) 1230.08,2833.14 1702.15,2833.14 ; 1230.08,4392.19 ccw(c1230.08,3604.79) 1230.08,2817.39 1702.15,2817.39 ; 1230.08,4407.94 ccw(c1230.08,3604.79) 1230.08,2801.64 1702.15,2801.64 ; 1230.08,4423.69 ccw(c1230.08,3604.79) 1230.08,2785.89 1702.15,2785.89 ; 1230.08,4439.44 ccw(c1230.08,3604.79) 1230.08,2770.15 1702.15,2770.15 ; 1230.08,4455.19 ccw(c1230.08,3604.79) 1230.08,2754.4 1702.15,2754.4 ; 1230.08,4470.93 ccw(c1230.08,3604.79) 1230.08,2738.65 1702.15,2738.65 ; 1230.08,4486.68 ccw(c1230.08,3604.79) 1230.08,2722.9 1702.15,2722.9 ; 1230.08,4502.43 ccw(c1230.08,3604.79) 1230.08,2707.15 1702.15,2707.15 ; 1230.08,4518.18 ccw(c1230.08,3604.79) 1230.08,2691.41 1702.15,2691.41 ; 1230.08,4533.93 ccw(c1230.08,3604.79) 1230.08,2675.66 1702.15,2675.66 ; 1230.08,4549.67 ccw(c1230.08,3604.79) 1230.08,2659.91 1702.15,2659.91 ; 1230.08,4565.42 ccw(c1230.08,3604.79) 1230.08,2644.16 1702.15,2644.16 ; 1230.08,4581.17 ccw(c1230.08,3604.79) 1230.08,2628.41 1702.15,2628.41 ; 1230.29,3966.78 1702.36,3966.78 cw(c1702.36,3596.7) 1702.36,3226.63 ; 1230.29,3982.53 1702.36,3982.53 cw(c1702.36,3596.7) 1702.36,3210.88 ; 1230.29,3998.28 1702.36,3998.28 cw(c1702.36,3596.7) 1702.36,3195.13 ; 1230.29,4014.03 1702.36,4014.03 cw(c1702.36,3596.7) 1702.36,3179.38 ; 1230.29,4029.78 1702.36,4029.78 cw(c1702.36,3596.7) 1702.36,3163.63 ; 1230.29,4045.52 1702.36,4045.52 cw(c1702.36,3596.7) 1702.36,3147.89 ; 1230.29,4061.27 1702.36,4061.27 cw(c1702.36,3596.7) 1702.36,3132.14 ; 1230.29,4077.02 1702.36,4077.02 cw(c1702.36,3596.7) 1702.36,3116.39 ; 1230.29,4092.77 1702.36,4092.77 cw(c1702.36,3596.7) 1702.36,3100.64 ; 1230.29,4108.52 1702.36,4108.52 cw(c1702.36,3596.7) 1702.36,3084.89 ; 1230.29,4124.26 1702.36,4124.26 cw(c1702.36,3596.7) 1702.36,3069.15 ; 1230.29,4140.01 1702.36,4140.01 cw(c1702.36,3596.7) 1702.36,3053.4 ; 1230.29,4155.76 1702.36,4155.76 cw(c1702.36,3596.7) 1702.36,3037.65 ; 1230.29,4171.51 1702.36,4171.51 cw(c1702.36,3596.7) 1702.36,3021.9 ; 1230.29,4187.26 1702.36,4187.26 cw(c1702.36,3596.7) 1702.36,3006.15 ; 1230.29,4203 1702.36,4203 cw(c1702.36,3596.7) 1702.36,2990.41 ; 1230.29,4218.75 1702.36,4218.75 cw(c1702.36,3596.7) 1702.36,2974.66 ; 1230.29,4234.5 1702.36,4234.5 cw(c1702.36,3596.7) 1702.36,2958.91 ; 1230.29,4250.25 1702.36,4250.25 cw(c1702.36,3596.7) 1702.36,2943.16 ; 1230.29,4266 1702.36,4266 cw(c1702.36,3596.7) 1702.36,2927.41 ; 1230.29,4281.74 1702.36,4281.74 cw(c1702.36,3596.7) 1702.36,2911.67 ; 1230.29,4297.49 1702.36,4297.49 cw(c1702.36,3596.7) 1702.36,2895.92 ; 1230.29,4313.24 1702.36,4313.24 cw(c1702.36,3596.7) 1702.36,2880.17 ; 1230.29,4328.99 1702.36,4328.99 cw(c1702.36,3596.7) 1702.36,2864.42 ; 1230.29,4344.74 1702.36,4344.74 cw(c1702.36,3596.7) 1702.36,2848.67 ; 1230.29,4360.48 1702.36,4360.48 cw(c1702.36,3596.7) 1702.36,2832.93 ; 1230.29,4376.23 1702.36,4376.23 cw(c1702.36,3596.7) 1702.36,2817.18 ; 1230.29,4391.98 1702.36,4391.98 cw(c1702.36,3596.7) 1702.36,2801.43 ; 1230.29,4407.73 1702.36,4407.73 cw(c1702.36,3596.7) 1702.36,2785.68 ; 1230.29,4423.48 1702.36,4423.48 cw(c1702.36,3596.7) 1702.36,2769.93 ; 1230.29,4439.23 1702.36,4439.23 ; 1230.29,4454.97 1702.36,4454.97 cw(c1702.36,3596.7) 1702.36,2738.44 ; 1230.29,4470.72 1702.36,4470.72 cw(c1702.36,3596.7) 1702.36,2722.69 ; 1230.29,4486.47 1702.36,4486.47 cw(c1702.36,3596.7) 1702.36,2706.94 ; 1230.29,4502.22 1702.36,4502.22 cw(c1702.36,3596.7) 1702.36,2691.19 ; 1230.29,4517.97 1702.36,4517.97 cw(c1702.36,3596.7) 1702.36,2675.45 ; 1230.29,4533.71 1702.36,4533.71 cw(c1702.36,3596.7) 1702.36,2659.7 ; 1230.29,4549.46 1702.36,4549.46 cw(c1702.36,3596.7) 1702.36,2643.95 ; 1230.29,4565.21 1702.36,4565.21 cw(c1702.36,3596.7) 1702.36,2628.2 ; 1230.29,4580.96 1702.36,4580.96 cw(c1702.36,3596.7) 1702.36,2612.45 ; 1702.36,2754.19 ccw(c1702.36,3596.7) 1702.36,4439.22
  Top Layer w15: 65,3465.41 65,3612.5 102.5,3650 ; v1@152.5,3035.58 150.58,3035.58 v1(150.58,3039.42) 120,3070 120,3180 120,3525 155,3560
  Top Layer w20: 102.5,3650 v1@220.4,3650 ; 155,3560 218.03,3560 v1(219.22,3561.19) ; v1@214.98,3655.42 v1(221.22,3649.19)
  Top Layer w35.43: 1700.07,3274.48 v1(1465.03,3274.48) 1230,3274.48 cw(c1230,3605.19) 1230,3935.89 v1(1466.22,3935.89) 1702.44,3935.89 cw(c1702.44,3605.19) 1700.08,3274.49
  Top Layer w39.37: 630,1205 v2(630,1245) v2(630,1285) v2@630,1323.54 ; v2@718.85,890 718.85,855 718.85,398.06 695.79,375 73.06,375 50,398.06 50,1870 50,1916.94 73.06,1940 696.94,1940 720,1916.94 720,1202.39 ; v2(720,890) v2(720,920)
  Bottom Layer w8: 247.17,3648.43 cw(c1230.08,3596.92) 1230.08,4581.17 ; 860,3604.79 899.37,3604.79 ; 860.05,3603.38 ccw(c1230.08,3596.92) 1230.08,3226.84 1702.15,3226.84 ; 1229.86,2628.63 cw(c1229.86,3597.13) 1229.86,4565.63 ; 1230.08,2628.41 1702.15,2628.41 ; 1230.08,3982.74 ccw(c1230.08,3596.92) 1230.08,3211.09 1702.15,3211.09 ; 1230.08,3998.49 ccw(c1230.08,3596.92) 1230.08,3195.34 1702.15,3195.34 ; 1230.08,4014.24 ccw(c1230.08,3596.92) 1230.08,3179.59 1702.15,3179.6 ; 1230.08,4029.99 ccw(c1230.08,3596.92) 1230.08,3163.85 1702.15,3163.85 ; 1230.08,4045.74 ccw(c1230.08,3596.92) 1230.08,3148.1 1702.15,3148.1 ; 1230.08,4061.48 ccw(c1230.08,3596.92) 1230.08,3132.35 1702.15,3132.35 ; 1230.08,4077.23 ccw(c1230.08,3596.92) 1230.08,3116.6 1702.15,3116.6 ; 1230.08,4092.98 ccw(c1230.08,3596.92) 1230.08,3100.85 1702.15,3100.85 ; 1230.08,4108.73 ccw(c1230.08,3596.92) 1230.08,3085.11 1702.15,3085.11 ; 1230.08,4124.48 ccw(c1230.08,3596.92) 1230.08,3069.36 1702.15,3069.36 ; 1230.08,4140.22 ccw(c1230.08,3596.92) 1230.08,3053.61 1702.15,3053.61 ; 1230.08,4155.97 ccw(c1230.08,3596.92) 1230.08,3037.86 1702.15,3037.86 ; 1230.08,4171.72 ccw(c1230.08,3596.92) 1230.08,3022.11 1702.15,3022.11 ; 1230.08,4187.47 ccw(c1230.08,3596.92) 1230.08,3006.37 1702.15,3006.37 ; 1230.08,4203.22 ccw(c1230.08,3596.92) 1230.08,2990.62 1702.15,2990.62 ; 1230.08,4218.96 ccw(c1230.08,3596.92) 1230.08,2974.87 1702.15,2974.87 ; 1230.08,4234.71 ccw(c1230.08,3596.92) 1230.08,2959.12 1702.15,2959.12 ; 1230.08,4250.46 ccw(c1230.08,3596.92) 1230.08,2943.37 1702.15,2943.37 ; 1230.08,4266.21 ccw(c1230.08,3596.92) 1230.08,2927.63 1702.15,2927.63 ; 1230.08,4281.96 ccw(c1230.08,3596.92) 1230.08,2911.88 1702.15,2911.88 ; 1230.08,4297.7 ccw(c1230.08,3596.92) 1230.08,2896.13 1702.15,2896.13 ; 1230.08,4313.45 ccw(c1230.08,3596.92) 1230.08,2880.38 1702.15,2880.38 ; 1230.08,4329.2 ccw(c1230.08,3596.92) 1230.08,2864.63 1702.15,2864.63 ; 1230.08,4344.95 ccw(c1230.08,3596.92) 1230.08,2848.89 1702.15,2848.89 ; 1230.08,4360.7 ccw(c1230.08,3596.92) 1230.08,2833.14 1702.15,2833.14 ; 1230.08,4376.45 ccw(c1230.08,3596.92) 1230.08,2817.39 1702.15,2817.39 ; 1230.08,4392.19 ccw(c1230.08,3596.92) 1230.08,2801.64 1702.15,2801.64 ; 1230.08,4407.94 ccw(c1230.08,3596.92) 1230.08,2785.89 1702.15,2785.89 ; 1230.08,4423.69 ccw(c1230.08,3596.92) 1230.08,2770.15 1702.15,2770.15 ; 1230.08,4439.44 ccw(c1230.08,3596.92) 1230.08,2754.4 1702.15,2754.4 ; 1230.08,4455.19 ccw(c1230.08,3596.92) 1230.08,2738.65 1702.15,2738.65 ; 1230.08,4470.93 ccw(c1230.08,3596.92) 1230.08,2722.9 1702.15,2722.9 ; 1230.08,4486.68 ccw(c1230.08,3596.92) 1230.08,2707.15 1702.15,2707.15 ; 1230.08,4502.43 ccw(c1230.08,3596.92) 1230.08,2691.41 1702.15,2691.41 ; 1230.08,4518.18 ccw(c1230.08,3596.92) 1230.08,2675.66 1702.15,2675.66 ; 1230.08,4533.93 ccw(c1230.08,3596.92) 1230.08,2659.91 1702.15,2659.91 ; 1230.08,4549.67 ccw(c1230.08,3596.92) 1230.08,2644.16 1702.15,2644.16 ; 1230.29,3982.53 1702.36,3982.53 cw(c1702.36,3604.58) 1702.36,3226.63 ; 1230.29,3998.28 1702.36,3998.28 cw(c1702.36,3604.58) 1702.36,3210.88 ; 1230.29,4014.03 1702.36,4014.03 cw(c1702.36,3604.58) 1702.36,3195.13 ; 1230.29,4029.78 1702.36,4029.78 cw(c1702.36,3604.58) 1702.36,3179.38 ; 1230.29,4045.52 1702.36,4045.52 cw(c1702.36,3604.58) 1702.36,3163.63 ; 1230.29,4061.27 1702.36,4061.27 cw(c1702.36,3604.58) 1702.36,3147.89 ; 1230.29,4077.02 1702.36,4077.02 cw(c1702.36,3604.58) 1702.36,3132.14 ; 1230.29,4092.77 1702.36,4092.77 cw(c1702.36,3604.58) 1702.36,3116.39 ; 1230.29,4108.52 1702.36,4108.52 cw(c1702.36,3604.58) 1702.36,3100.64 ; 1230.29,4124.26 1702.36,4124.26 cw(c1702.36,3604.58) 1702.36,3084.89 ; 1230.29,4140.01 1702.36,4140.01 cw(c1702.36,3604.58) 1702.36,3069.15 ; 1230.29,4155.76 1702.36,4155.76 cw(c1702.36,3604.58) 1702.36,3053.4 ; 1230.29,4171.51 1702.36,4171.51 cw(c1702.36,3604.58) 1702.36,3037.65 ; 1230.29,4187.26 1702.36,4187.26 cw(c1702.36,3604.58) 1702.36,3021.9 ; 1230.29,4203 1702.36,4203 cw(c1702.36,3604.58) 1702.36,3006.15 ; 1230.29,4218.75 1702.36,4218.75 cw(c1702.36,3604.58) 1702.36,2990.41 ; 1230.29,4234.5 1702.36,4234.5 cw(c1702.36,3604.58) 1702.36,2974.66 ; 1230.29,4250.25 1702.36,4250.25 cw(c1702.36,3604.58) 1702.36,2958.91 ; 1230.29,4266 1702.36,4266 cw(c1702.36,3604.58) 1702.36,2943.16 ; 1230.29,4281.74 1702.36,4281.74 cw(c1702.36,3604.58) 1702.36,2927.41 ; 1230.29,4297.49 1702.36,4297.49 cw(c1702.36,3604.58) 1702.36,2911.67 ; 1230.29,4313.24 1702.36,4313.24 cw(c1702.36,3604.58) 1702.36,2895.92 ; 1230.29,4328.99 1702.36,4328.99 cw(c1702.36,3604.58) 1702.36,2880.17 ; 1230.29,4344.74 1702.36,4344.74 cw(c1702.36,3604.58) 1702.36,2864.42 ; 1230.29,4360.48 1702.36,4360.48 cw(c1702.36,3604.58) 1702.36,2848.67 ; 1230.29,4376.23 1702.36,4376.23 cw(c1702.36,3604.58) 1702.36,2832.93 ; 1230.29,4391.98 1702.36,4391.98 cw(c1702.36,3604.58) 1702.36,2817.18 ; 1230.29,4407.73 1702.36,4407.73 cw(c1702.36,3604.58) 1702.36,2801.43 ; 1230.29,4423.48 1702.36,4423.48 cw(c1702.36,3604.58) 1702.36,2785.68 ; 1230.29,4439.23 1702.36,4439.23 ; 1230.29,4454.97 1702.36,4454.97 cw(c1702.36,3604.58) 1702.36,2754.19 ; 1230.29,4470.72 1702.36,4470.72 cw(c1702.36,3604.58) 1702.36,2738.44 ; 1230.29,4486.47 1702.36,4486.47 cw(c1702.36,3604.58) 1702.36,2722.69 ; 1230.29,4502.22 1702.36,4502.22 cw(c1702.36,3604.58) 1702.36,2706.94 ; 1230.29,4517.97 1702.36,4517.97 cw(c1702.36,3604.58) 1702.36,2691.19 ; 1230.29,4533.71 1702.36,4533.71 cw(c1702.36,3604.58) 1702.36,2675.45 ; 1230.29,4549.46 1702.36,4549.46 cw(c1702.36,3604.58) 1702.36,2659.7 ; 1230.29,4565.21 1702.36,4565.21 cw(c1702.36,3604.58) 1702.36,2643.95 ; 1230.29,4580.96 1702.36,4580.96 cw(c1702.36,3604.58) 1702.36,2628.2 ; 1702.36,2769.93 ccw(c1702.36,3604.58) 1702.36,4439.22
  Bottom Layer w15: v1(150.58,3039.42) 830,2360 830,1025 v2@727.69,922.69
  Bottom Layer w23.62: v1@899.37,3585.11 v1@899.37,3624.48
  Bottom Layer w39.37: v2(630,1245) 630,1872.12 606.94,1895.18 73.06,1895.18 50,1872.12 50,453.25 73.06,430.18 584.27,430.18 607.34,453.25 607.34,727.34 720,840 v2(720,855) v2(720,890) v2(720,920)
  other v1: 1052.91,3325.26 1879.68,3325.26 219.22,3511.19 899.37,3581.17 899.37,3628.41 220.22,3701.19 1052.91,3884.32 1879.68,3884.32
  other v2: 720,1065 718.08,1104.24 628.74,1323.54
  other v3: 177.17,236.22 2696.85,236.22 177.17,4409.45 2696.85,4409.45

## Polygon pours and split planes (outlines as drawn)
9V on Bottom Layer "9V_L02_P001" (solid, remove dead copper, pour order 1): 940,2515 2875,2515 2875,0 935,0 930,-5

## Keep-outs
Keep-Out Layer:
  lines w10: 0,4645.67 0,0 2874.02,0 ; 0,4650 2874.02,4649.96 ; 1700.41,3321.72 1230,3321.72 cw(c1230,3605.19) 1230,3888.65 1702.44,3888.65 cw(c1702.44,3605.19) 1700.41,3321.73 ; 2874.65,5 2874.65,4650.67

## Other copper
Top Layer:
  rectangle: 200.22,3635.19 241.89,3719.19
  rectangle: 200.22,3492.19 242.22,3577.19
Bottom Layer:
  rectangle: 200.22,3635.19 249.76,3719.19
  rectangle: 200.22,3492.19 242.22,3577.19

## Silkscreen, mask and mechanical layers (free items; w line width, h text height)
Top Overlay:
  lines w39.37: 1230.08,2573.3 cw(c1230.08,3596.92) 1230.08,4620.54 1702.36,4620.54 cw(c1702.36,3596.92) 1702.36,2573.3 1230.08,2573.3
Bottom Overlay:
  text "RF" at 2720,2355 h60
  text "LF" at 2720,1695 h60

## Text inside footprints (layer, text, board x,y; h text height)
U3: Bottom Overlay "3641BS" at 1709.9,2226.3 h80